# Altium PCB PCB1.PcbDoc
Units mm, origin at the board's own origin, x right, y up, seen from the top; angles counter-clockwise.
Board outline 122 x 121 mm, 2 copper layers (Top Layer, Bottom Layer); 36 components, 35 nets, 128 pads, 0 vias.
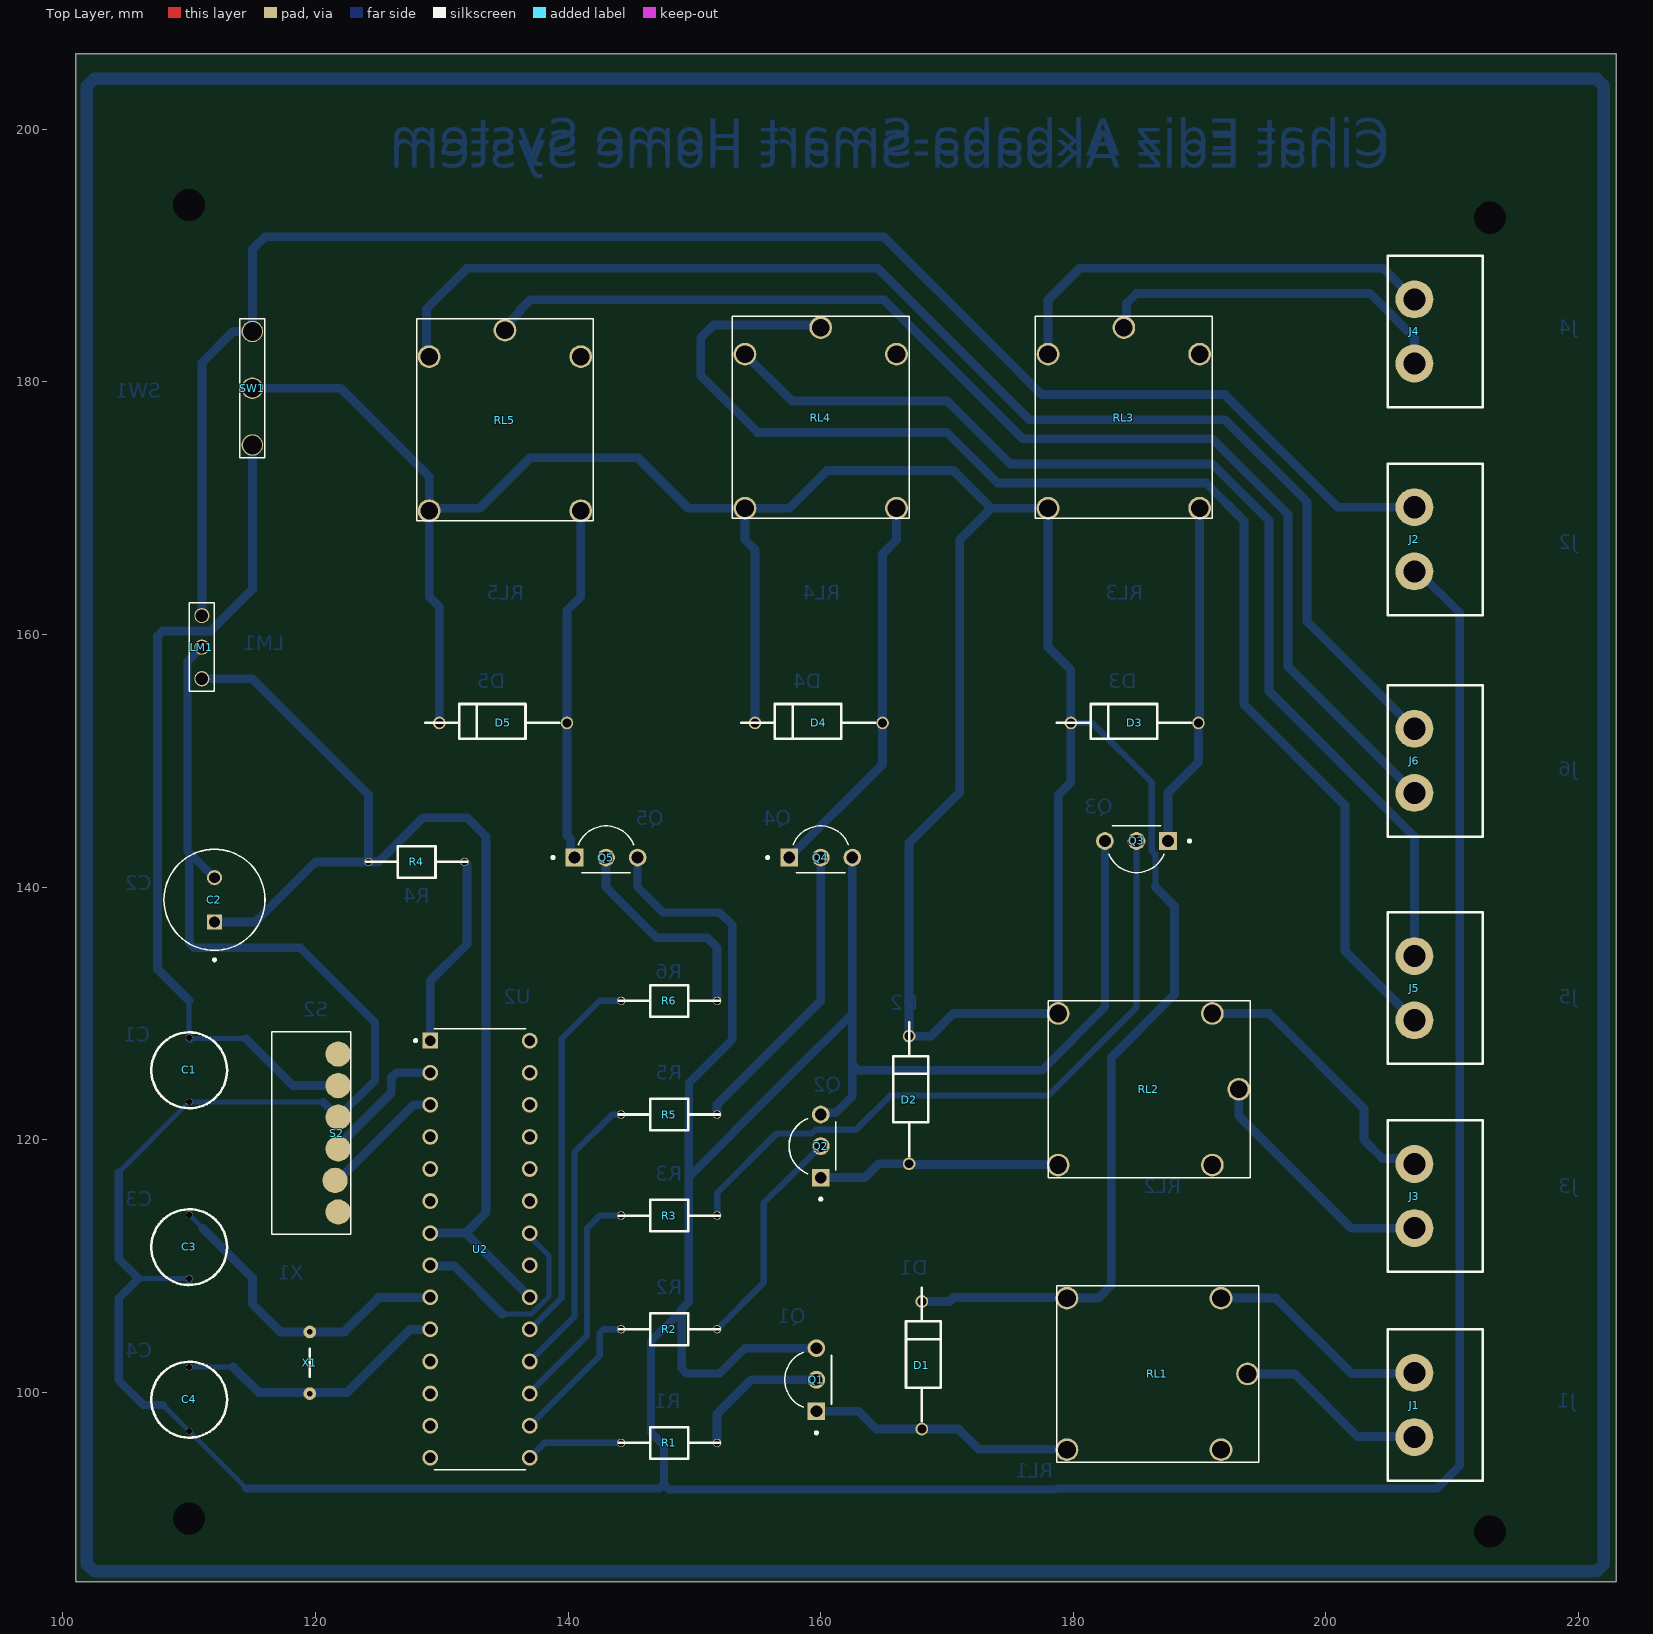
[diagram p0: Top Layer view]
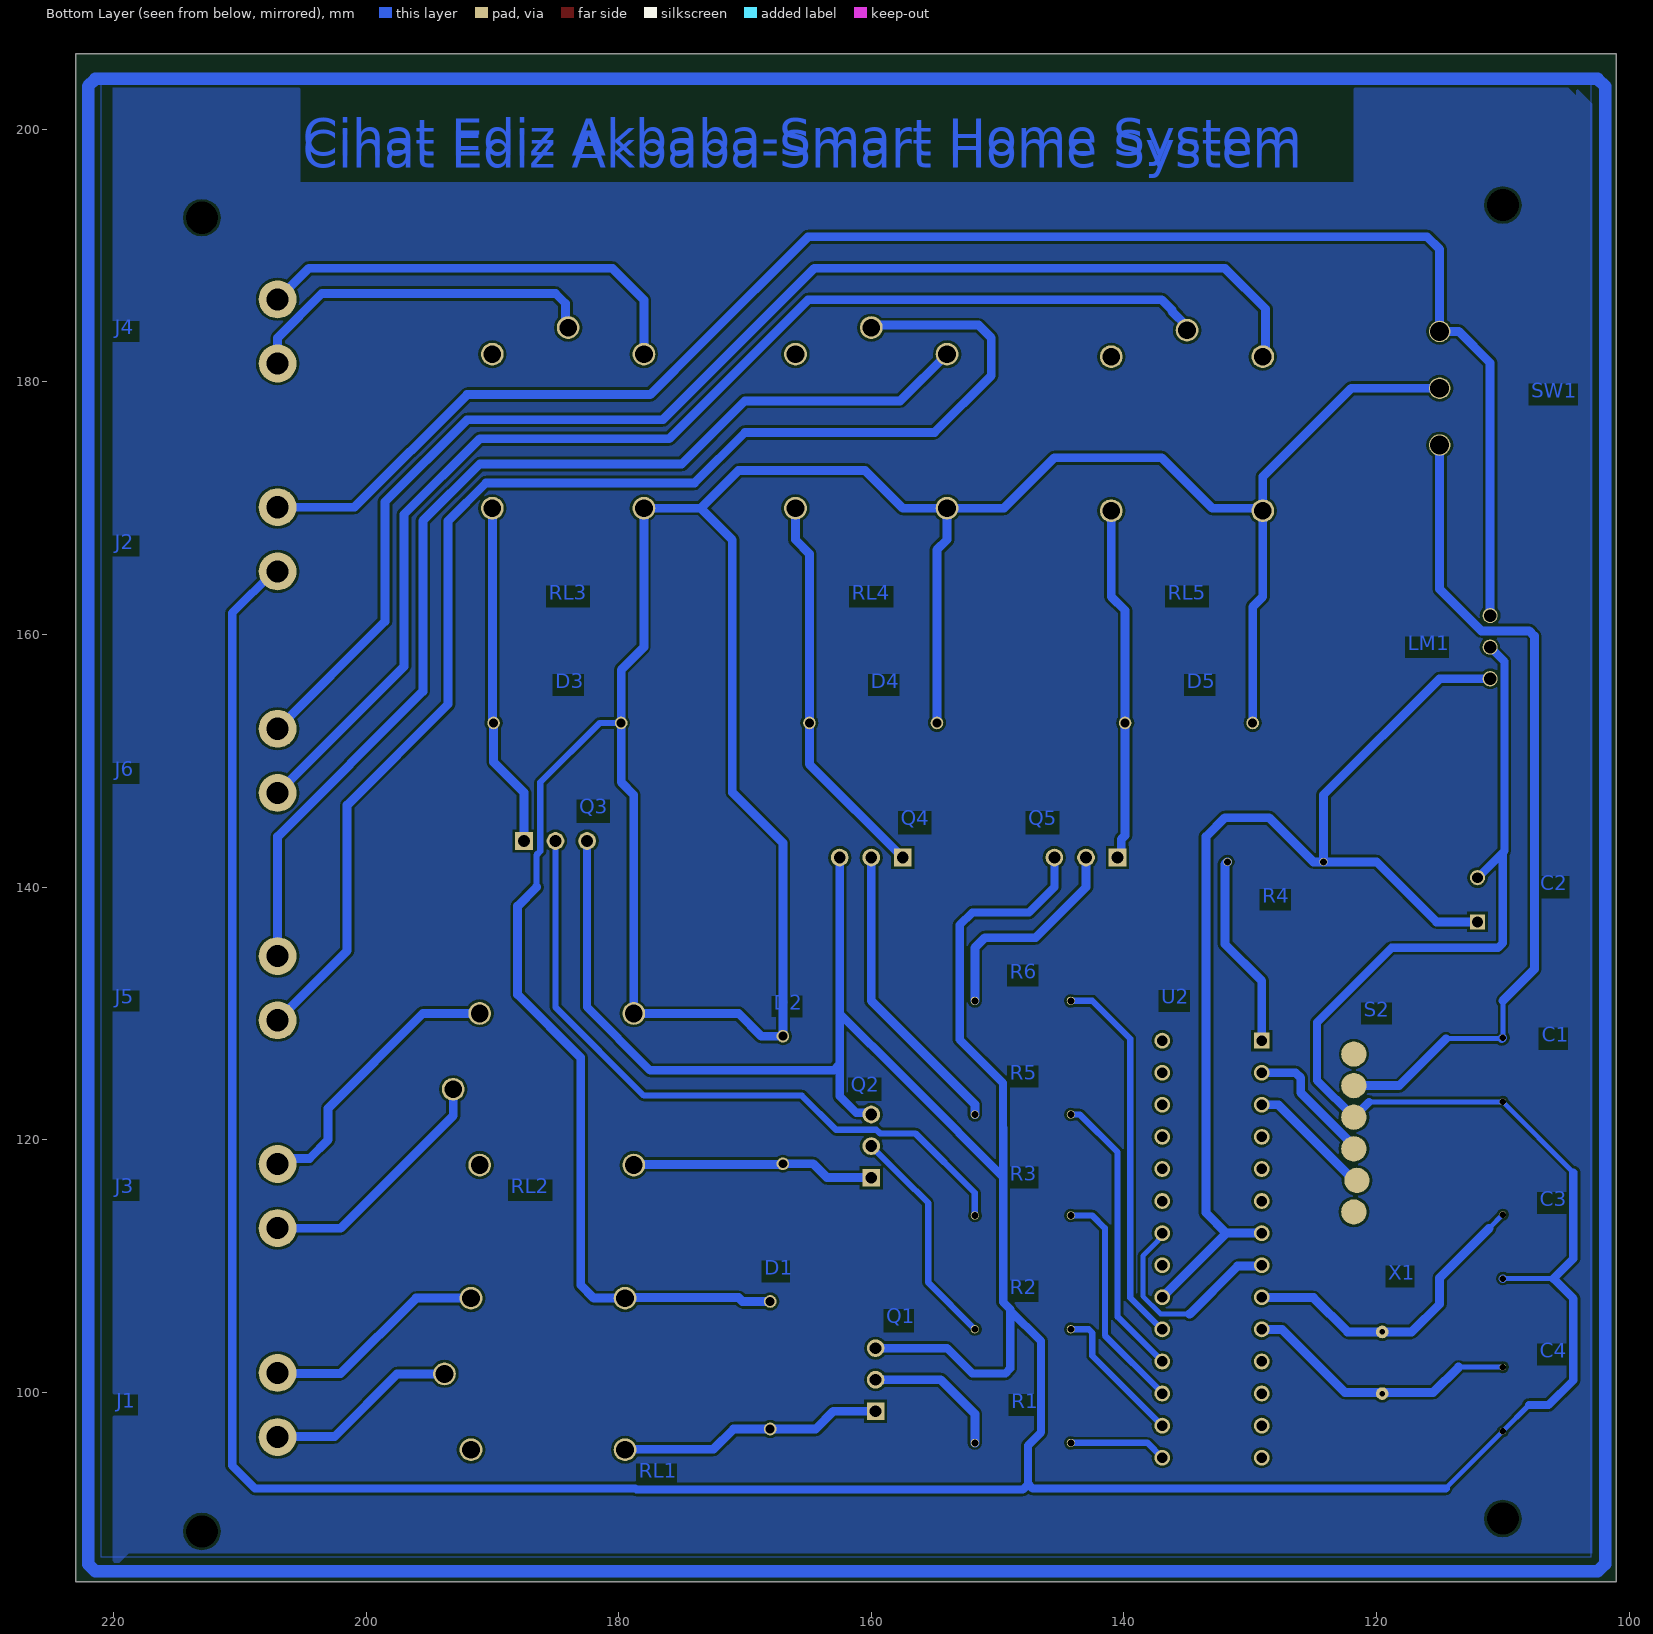
[diagram p1: Bottom Layer view, seen from below]
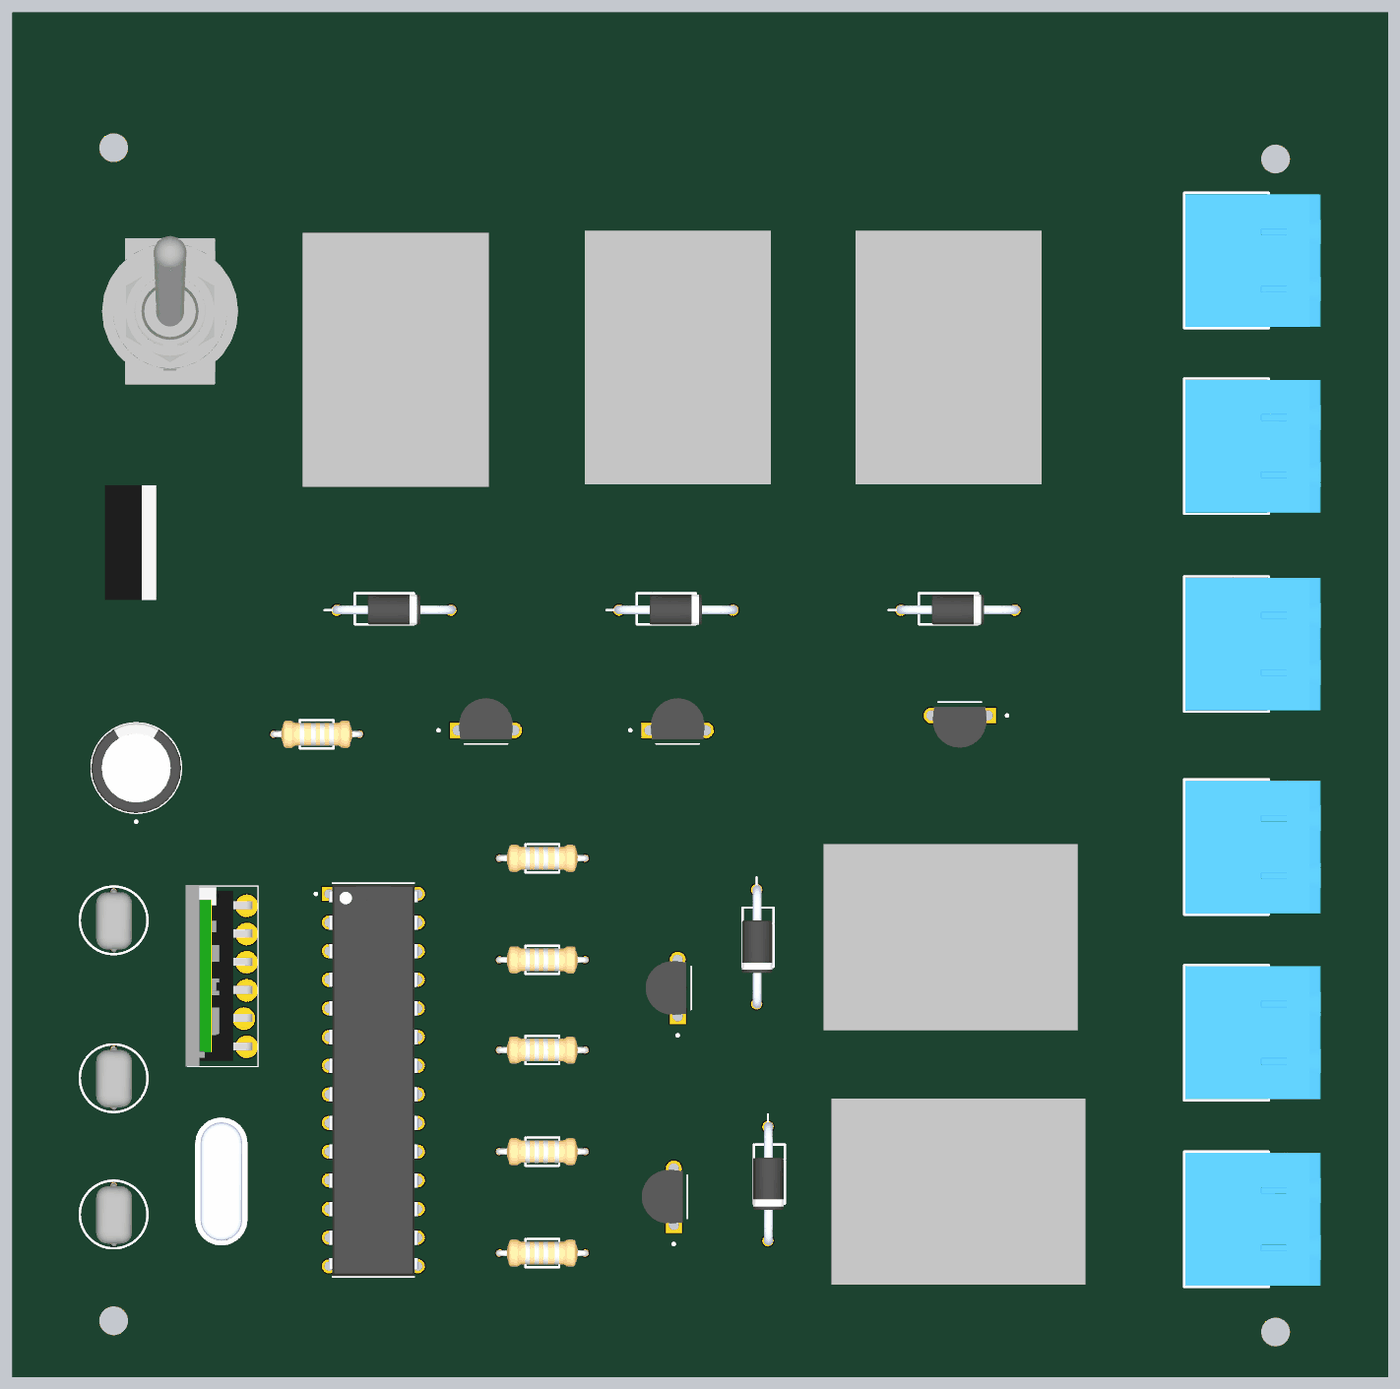
[diagram p2: 3D render of the assembled board from above, using the file's embedded part models]

## Layer stack, top to bottom
Top Solder: solder mask 0.0102, Solder Resist, Dk 3.5
Top Layer: signal copper 0.0356
Dielectric 1: dielectric 0.32, FR-4, Dk 4.8
Bottom Layer: signal copper 0.0356
Bottom Solder: solder mask 0.0102, Solder Resist, Dk 3.5

## Board outline
101,85 223,85 223,206 101,206

## Design rules (kind name [scope] priority, off if disabled: settings)
Clearance [All] p1: gap=0.2 ignorepadtopadclearanceinfootprint=FALSE except(0: Text-Hole; 0.255: Arc-Via Track-Via SMDPad-Via THPad-Via Via-Via)
PolygonConnect [All] p1: connectstyle=Relief reliefconductorwidth=0.254 reliefentries=4 polygonreliefangle="90 Angle" airgapwidth=0.254
RoutingVias [All] p1: holewidth=0.711 width=1.27 viastyle="Through Hole" minholewidth=0.711 minwidth=1.27 maxholewidth=0.711 maxwidth=1.27
SilkToSolderMaskClearance [IsPad] p1: minsilkscreentomaskgap=0 clearancetoexposedcopper=TRUE
SolderMaskExpansion [All] p1: expansion=0.102 istentingtop=FALSE
Width [All] p1: maxlimit=1 minlimit=0.254 preferedwidth=0.65 minimp=50.000000 maximp=50.000000 favimp=50.000000
29 further rules are at their usual default settings.

## Classes and differential pairs
component class Sheet1: 32 C1 C2 D1 D2 D3 D4 D5 J1 J3 J4 J5 L LM1 Q1 Q2 Q3 Q4 Q5 R1 R3 R4 R5 RL1 RL2 RL3 RL4 RL5 S2 SW1 U2 X1

## Components (designator, comment, footprint, x,y, rotation, side; value= is the part's Value field where it differs from the comment)
C1 "capacitor" CAPACITOR 110,123 r90 top
C2 "EEUFR1V101B" CAPPRD350W60D800H1150 112,139 r90 top
C3 "capacitor" CAPACITOR 110,109 r90 top
C4 "capacitor" CAPACITOR 110,96.92 r90 top
D1 "1N4007" 1N4007 168,103 r90 top
D2 "1N4007" 1N4007 167,124 r90 top
D3 "1N4007" 1N4007 184,153 r180 top
D4 "1N4007" 1N4007 159,153 r180 top
D5 "1N4007" 1N4007 134,153 r180 top
J1 "TBP01R1-508-02BE" TBP01R1-508 207,99 r90 top
J2 "TBP01R1-508-02BE" TBP01R1-508 207,167.54 r90 top
J3 "TBP01R1-508-02BE" TBP01R1-508 207,115.54 r90 top
J4 "TBP01R1-508-02BE" TBP01R1-508 207,184 r90 top
J5 "TBP01R1-508-02BE" TBP01R1-508 207,132 r90 top
J6 "TBP01R1-508-02BE" TBP01R1-508 207,150 r90 top
LM1 "LM7805" LM7805 111,161.5 r270 top
Q1 "BC547B" TO92250P510H770-3 159,101 r90 top
Q2 "BC547B" TO92250P510H770-3 159.345,119.5 r90 top
Q3 "BC547B" TO92250P510H770-3 185,143 r180 top
Q4 "BC547B" TO92250P510H770-3 160,143 r0 top
Q5 "BC547B" TO92250P510H770-3 143,143 r0 top
R1 "resistor" RES 148,96 r0 top
R2 "resistor" RES 148,105 r0 top
R3 "resistor" RES 148,114 r0 top
R4 "resistor" RES 128,142 r180 top
R5 "resistor" RES 148,122 r0 top
R6 "resistor" RES 148,131 r0 top
RL1 "relay" relay 191.69,95.461 r180 top
RL2 "relay" relay 191,118 r180 top
RL3 "relay" relay 190,182.2 r270 top
RL4 "relay" relay 166,182.2 r270 top
RL5 "relay" relay 141,182 r270 top
S2 "HC-06" HC-06 118.797,120.285 r90 top
SW1 "Switch" "toggle switch" 115,175 r90 top
U2 "ATMEGA328-PU" DIP787W46P254L3467H508Q28 133.023,111.338 r0 top
X1 "CRYSTAL" CRYSTAL 119.547,102.345 r90 top

## Footprints (in the part's own frame and the unit in brackets; to place one, negate y for a bottom-side part, rotate by r counter-clockwise, add the part's x,y. Pads: shape width x height; smd on the part's side, far side on the other; paste and mask are expansions set on the pad)
1N4007 [mm]
  round 1 hole 0.71: 1(-5.9,0) 2(4.2,0)
  silkscreen extent -5.3,-1.5 5.3,1.25, body extent -6.32,-1.39 4.62,1.3, height 12.69
CAPACITOR [mm]
  round 0.53 hole 0.51: 1(0,0) 2(5.08,0)
  silkscreen extent -0.5,-3 5.5,3, body extent -24.4,-1.63 5.26,5.5, height 6.81
CAPPRD350W60D800H1150 [mm]
  round 1.2 hole 0.85: N(1.75,0)
  rect 1.2x1.2 hole 0.85: P(-1.75,0)
  silkscreen extent -4.85,-4 4,4, body extent -4,-4 4,4, height 11.5
CRYSTAL [mm]
  round 1 hole 0.43: 1(-2.44,0) 2(2.44,0)
  silkscreen extent -1.11,0 1.11,0, body extent -5.67,-2.33 5.67,2.32, height 11.5
DIP787W46P254L3467H508Q28 [mm]
  rect 1.25x1.25 hole 0.83: 1(-3.937,16.51)
  round 1.25 hole 0.83: 2(-3.937,13.97) 3(-3.937,11.43) 4(-3.937,8.89) 5(-3.937,6.35) 6(-3.937,3.81) 7(-3.937,1.27) 8(-3.937,-1.27) 9(-3.937,-3.81) 10(-3.937,-6.35) 11(-3.937,-8.89) 12(-3.937,-11.43) 13(-3.937,-13.97) 14(-3.937,-16.51) 15(3.937,-16.51) 16(3.937,-13.97) 17(3.937,-11.43) 18(3.937,-8.89) 19(3.937,-6.35) 20(3.937,-3.81) 21(3.937,-1.27) 22(3.937,1.27) 23(3.937,3.81) 24(3.937,6.35) 25(3.937,8.89) 26(3.937,11.43) 27(3.937,13.97) 28(3.937,16.51)
  silkscreen extent -5.2,-17.45 3.62,17.45, body extent -3.95,-17.34 3.95,17.34, height 4.57
HC-06 [mm]
  round 2 all layers, no hole: 1(-6,-3) 2(-3.5,-2.75) 3(-1,-3) 4(1.5,-3) 5(4,-3) 6(6.5,-3)
  silkscreen extent -7.75,-4 8.25,2.25, body extent -7.75,-3.5 8.35,2.4, height 39
LM7805 [mm]
  round 1.2 hole 1: 1(0,0) 2(2.5,0) 3(5,0)
  silkscreen extent -1,-1 6,1, body extent -2.58,-1.8 7.58,2.77, height 21.74
relay [mm]
  round 1.8 hole 1.4: 1(12.2,0) 2(12.2,-12) C(-2.1,-6) NC(0,0) NO(0,-12)
  silkscreen extent -3,-13 13,1, body extent -4.45,-14.25 18.05,2.25, height 21
RES [mm]
  round 0.65 hole 0.55: 1(-3.8,0) 2(3.8,0)
  silkscreen extent -4,-1.25 4,1.25, body extent -4.09,-1.2 4.08,1.2, height 4.2
TBP01R1-508 [mm]
  round 3 hole 1.75 mask+0.05: 1(-2.54,0) 2(2.54,0)
  silkscreen extent -6,-5.4 6,2.1, body extent -5.88,-10 5.88,2, height 8.55
TO92250P510H770-3 [mm]
  rect 1.4x1.4 hole 0.93: 1(-2.5,-0.655)
  round 1.4 hole 0.93: 2(0,-0.655) 3(2.5,-0.655)
  silkscreen extent -4.3,-1.85 2.18,1.85, body extent -2.38,-1.43 2.38,2.19, height 5.33
"toggle switch" [mm]
  round 1.7 hole 1.5: 1(0,0) 2(4.5,0) 3(9,0)
  silkscreen extent -1,-1 10,1, body extent -1.99,-6.03 11.17,6.03, height 31.6

## Part data
C2: "AL LYTIC, RADIAL, 35VDC, 100UF", Package="RADIAL-2 Panasonic", Availability="In Stock", Check_prices=https://www.snapeda.com/parts/EEUFR1V101B/Panasonic/view-part/5790218/?ref=eda, MF=Panasonic, MP=EEUFR1V101B, Price=None, SnapEDA_Link=https://www.snapeda.com/parts/EEUFR1V101B/Panasonic/view-part/5790218/?ref=snap
J1 J2 J3 J4 J5 J6: "Conn Shrouded Header HDR 2 POS 5.08mm Solder RA Side Entry Thru-Hole Bag", Manufacturer=CUI, Supplier Part Number 1=102-6406-ND, Designed by=BERK, Manufacturer Part Number=TBP01R1-508-02BE, Pricing 1="1=0,50000, 10=0,26500, 25=0,18760, 50=0,15960, 100=0,15400, 250=0,13020, 500=0,12040, 1000=0,10640, 5000=0,08120 (USD)", RoHS=No, Stock 1=3398, Supplier 1=Digi-Key
Q1 Q2 Q3 Q4 Q5: "Bipolar (BJT) Transistor NPN 45 V 100 mA 300MHz 625 mW Through Hole TO-92 (TO-226)", Package="TO-92-3 ON Semiconductor", Availability="In Stock", Check_prices=https://www.snapeda.com/parts/BC547B/Onsemi/view-part/?ref=eda, MF="ON Semiconductor", MP=BC547B, Price=None, Purchase-URL=https://pricing.snapeda.com/search/part/BC547B/?ref=eda, SnapEDA_Link=https://www.snapeda.com/parts/BC547B/Onsemi/view-part/?ref=snap
U2: "AVR AVRÂ® ATmega Microcontroller IC 8-Bit 20MHz 32KB (16K x 16) FLASH 28-PDIP", Package="DIP-28 Microchip Technology", Availability="In Stock", Check_prices=https://www.snapeda.com/parts/ATMEGA328-PU/Microchip/view-part/?ref=eda, MF="Microchip Technology", MP=ATMEGA328-PU, Price=None, Purchase-URL=https://pricing.snapeda.com/search/part/ATMEGA328-PU/?ref=eda, SnapEDA_Link=https://www.snapeda.com/parts/ATMEGA328-PU/Microchip/view-part/?ref=snap

## Free pads (board coordinates)
  round 1.2 hole 2.54: 29(110,90) 29(110,194) 29(213,89) 29(213,193)

## Nets (pads, with @x,y where several pads share a name; then routed paths per layer and width w, separated by ;. In a path a pad name is that pad's centre, name@x,y a point inside that pad or via, vN(x,y) a via of type N, cw(c..) or ccw(c..) an arc to the next point about the centre after c; other vN are vias at no path point)
+5: C1.2 S2.5 SW1.1 | length 66.7
  Bottom Layer w0.4: C1.2 110,131 ; C1.2@110.08,128 114.5,128
  Bottom Layer w0.7: C1.2 C1.2@110.08,128 ; 110,131 107.5,133.5 107.5,159.88 107.91,160.29 111.71,160.29 115,163.58 SW1.1 ; 114.5,128 118.215,124.285 S2.5
+12: J2.2 LM1.1 SW1.3 | length 132.8
  Bottom Layer w0.7: LM1.1 111,181.5 113.5,184 SW1.3 115,190.5 116,191.5 165,191.5 173.5,183 177.5,179 192,179 200.92,170.08 J2.2
CommonRelay: D1.2 D2.2 D3.2 D4.2 D5.2 RL1.2 RL2.2 RL3.2 RL4.2 RL5.2 SW1.2 | length 273.7
  Bottom Layer w0.5: D3.2 181.5,153 186.204,148.296 186.204,142.838 186.5,142.542 186.5,140
  Bottom Layer w0.7: SW1.2 122,179.5 129,172.5 RL5.2 ; D5.2 129.8,162.2 129,163 RL5.2 ; D4.2 154.8,166.7 154,167.5 RL4.2 ; D1.2 170.2,107.2 170.5,107.5 179.451,107.5 RL1.2 181.961,107.461 183,108.5 183,126.5 188,131.5 188,138.5 186.5,140 ; RL5.2 129.2,170 133,170 137,174 145.5,174 149.5,170 RL4.2 ; RL4.2 157.5,170 160.5,173 170.5,173 173.5,170 ; 173.5,170 171,167.5 171,147.5 167,143.5 D2.2 168.7,128.2 170.5,130 RL2.2 178.8,147.3 179.8,148.3 D3.2 179.8,157.2 178,159 RL3.2 173.5,170
GND: C1.1 C2.N C3.1 C4.1 J2.1 LM1.2 Q1.3 Q2.3 Q3.3 Q4.3 Q5.3 S2.4 U2.8 U2.22 | length 445.5
  Bottom Layer w0.4: 104.416,117.416 C1.1 120.582,123 ; 105.979,109.021 C3.1@109.979,109.021 ; 107.92,99 C4.1 114.52,92.4 ; 134.8,106.2 137.082,106.2 138.5,107.618 138.5,110.8 137.292,112.008 137.292,112.046 136.96,112.378 U2.22
  Bottom Layer w0.65: 104.416,117.416 104.416,110.584 106,109 104.419,107.419 104.419,100.962 106.381,99 107.92,99 ; C3.1@109.979,109.021 C3.1 ; LM1.2 109.875,157.875 109.875,142.875 110,142.75 ; C2.N@111.93,140.93 111.82,140.93 110,142.75 ; 114.52,92.4 147.219,92.4 147.6,92.781 147.6,95.804 146.566,96.838 146.566,104.066 149,106.5 ; 120.582,123 S2.4 124.7,124.688 124.7,129.3 118.8,135.2 110.381,135.2 110,135.581 110,142.75 ; Q5.3 145.5,140 147.5,138 152,138 153,137 153,127.937 149.563,124.5 149.563,120.942 ; 147.6,92.7 148,92.3 178.593,92.3 178.693,92.4 208.8,92.4 210.6,94.2 210.6,161.7 207.3,165 J2.1 ; 149.558,120.942 149.558,117.058 ; Q1.3 154,103.5 152,101.5 149.381,101.5 149,101.881 149,106.5 ; Q2.3 160.144,122.144 161.196,122.144 162.5,123.448 162.5,126 ; Q4.3 162.5,130 ; Q3.3@182.5,143.5 182.5,130.5 177.5,125.5 163,125.5 162.5,126 ; 149,106.5 149,106.587 149.558,107.146 149.558,117.058 ; 149.558,117.058 156.625,124.125 157.5,125 162.5,130 ; 162.5,126 162.5,130
  Bottom Layer w0.7: U2.8@129,110 131,110 134.8,106.2
NetC2_P: C2.P LM1.3 R4.2 U2.7 U2.20 | length 89.9
  Bottom Layer w0.7: LM1.3 115,156.5 124.2,147.3 R4.2 ; C2.P 115.25,137.25 120,142 R4.2 ; U2.7 131.88,112.608 ; U2.20 131.88,112.608 ; R4.2 125,142 128.5,145.5 132,145.5 133.5,144 133.5,114.228 131.88,112.608
NetD1_1: D1.1 Q1.1 RL1.1 | length 21.1
  Bottom Layer w0.7: Q1.1 163,98.5 164.4,97.1 D1.1 170.9,97.1 172.5,95.5 179.451,95.5 RL1.1
NetD2_1: D2.1 Q2.1 RL2.1 | length 19.3
  Bottom Layer w0.7: Q2.1 163.5,117 164.6,118.1 D2.1 167.05,118.05 178.75,118.05 RL2.1
NetD3_1: D3.1 Q3.1 RL3.1 | length 27.4
  Bottom Layer w0.7: Q3.1 187.5,147.5 189.9,149.9 D3.1 189.957,153.057 189.957,153.27 190,153.312 RL3.1
NetD4_1: D4.1 Q4.1 RL4.1 | length 31.2
  Bottom Layer w0.7: Q4.1 164.9,149.745 D4.1 164.9,166.4 166,167.5 RL4.1
NetD5_1: D5.1 Q5.1 RL5.1 | length 28.2
  Bottom Layer w0.7: Q5.1 140.205,142.64 140.205,143.795 139.9,144.1 D5.1 139.9,161.9 141,163 RL5.1
NetJ1_1: J1.1 RL1.C | length 15.3
  Bottom Layer w0.7: RL1.C 197.539,101.461 202.5,96.5 206.96,96.5 J1.1
NetJ1_2: J1.2 RL1.NO | length 17.8
  Bottom Layer w0.7: RL1.NO 196.039,107.461 202,101.5 206.96,101.5 J1.2
NetJ3_1: J3.1 RL2.C | length 19.7
  Bottom Layer w0.7: RL2.C 193.1,121.9 202,113 J3.1
NetJ3_2: J3.2 RL2.NO | length 22.4
  Bottom Layer w0.7: RL2.NO 195.5,130 203,122.5 203,120 204.48,118.52 206.56,118.52 J3.2
NetJ4_1: J4.1 RL3.C | length 28.6
  Bottom Layer w0.7: RL3.C 184.21,184.51 184.21,186.21 185,187 203.5,187 207,183.5 J4.1
NetJ4_2: J4.2 RL3.NO | length 35.4
  Bottom Layer w0.7: RL3.NO 178,186.5 180.5,189 204.54,189 J4.2
NetJ5_1: J5.1 RL4.C | length 105.9
  Bottom Layer w0.7: RL4.C 159.8,184.5 151.5,184.5 150.5,183.5 150.5,180.5 155,176 170,176 174,172 190.5,172 193.5,169 193.5,154.5 201.5,146.5 201.5,134.96 J5.1
NetJ5_2: J5.2 RL4.NO | length 86.2
  Bottom Layer w0.7: RL4.NO 157.7,178.5 170,178.5 175,173.5 191,173.5 195.5,169 195.5,155.5 207,144 J5.2
NetJ6_1: J6.1 RL5.C | length 96.5
  Bottom Layer w0.7: RL5.C 135,184.398 136.2,185.598 136.2,185.7 137,186.5 165,186.5 176,175.5 191,175.5 197,169.5 197,157.46 J6.1
NetJ6_2: J6.2 RL5.NO | length 104.1
  Bottom Layer w0.7: RL5.NO 128.79,182.21 128.79,185.79 132,189 164.5,189 176.5,177 192,177 198.5,170.5 198.5,161.04 J6.2
NetQ1_2: Q1.2 R1.2 | length 11.3
  Bottom Layer w0.7: R1.2 151.8,98.3 154.5,101 Q1.2
NetQ2_2: Q2.2 R2.2 | length 17.9
  Bottom Layer w0.5: R2.2 155.5,108.7 155.5,115 157.5,117 Q2.2
NetQ3_2: Q3.2 R3.2 | length 54.2
  Bottom Layer w0.5: R3.2 151.8,115.8 156.5,120.5 159.297,120.5 159.593,120.796 162.796,120.796 165.5,123.5 178,123.5 185,130.5 Q3.2
NetQ4_2: Q4.2 R5.2 | length 23.7
  Bottom Layer w0.7: R5.2 151.8,122.8 160,131 Q4.2
NetQ5_2: Q5.2 R6.2 | length 17.3
  Bottom Layer w0.7: Q5.2 143,140 147,136 151,136 151.8,135.2 R6.2
NetR4_1: R4.1 U2.1 | length 15.4
  Bottom Layer w0.7: U2.1 129.086,132.586 132,135.5 132,141.8 R4.1
PB1: R1.1 U2.15 | length 7.7
  Bottom Layer w0.5: U2.15 138.132,96 R1.1
PB2: R2.1 U2.16 | length 11.5
  Bottom Layer w0.5: U2.16 142.5,102.908 142.5,104.707 142.793,105 R2.1
PB3: R3.1 U2.17 | length 18.1
  Bottom Layer w0.5: U2.17 136.96,99.96 141.5,104.5 141.5,113 142.5,114 R3.1
PB4: R5.1 U2.18 | length 23
  Bottom Layer w0.5: U2.18 136.96,102.46 140.5,106 140.5,119 143.5,122 R5.1
PB5: R6.1 U2.19 | length 30
  Bottom Layer w0.5: U2.19 136.988,104.988 139.5,107.5 139.5,128 142.5,131 R6.1
RXD1: S2.2 U2.3 | length 10
  Bottom Layer w0.7: S2.2 121.785,116.785 127.768,122.768 U2.3
TXD1: S2.3 U2.2 | length 10.6
  Bottom Layer w0.7: S2.3 121.797,119.517 126,123.72 126,124.898 126.41,125.308 U2.2
XTAL1: C3.2 U2.9 X1.2 | length 25.3
  Bottom Layer w0.4: C3.2 111.08,113
  Bottom Layer w0.7: 111.08,113 115,109.08 115,107 117.215,104.785 X1.2 122.285,104.785 125,107.5 129.058,107.5 U2.9
XTAL2: C4.2 U2.10 X1.1 | length 22.1
  Bottom Layer w0.4: C4.2 113.5,102
  Bottom Layer w0.7: 113.5,102 115.5,100 119.452,100 X1.1 119.642,100 122.5,100 127.488,104.988 U2.10
pads on no net: RL1.NC RL2.NC RL3.NC RL4.NC RL5.NC S2.1 S2.6 U2.4 U2.5 U2.6 U2.11 U2.12 U2.13 U2.14 U2.21 U2.23 U2.24 U2.25 U2.26 U2.27 U2.28
copper on no net: | length 475.2
  Bottom Layer w1: 101.9,86.411 102.486,85.825 221.414,85.825 222,86.411 222,95.214 222,203.414 221.414,204 102.486,204 101.9,203.414 101.9,86.411

## Polygon pours and split planes (outlines as drawn)
no net on Bottom Layer "AC_LINE_2" (solid, pour order 4): 104.175,202.65 104.8,203.275 220.05,203.275 220.05,86.65 219.725,86.325 218.775,87.275 102.925,87.275 102.925,202.025 104.175,203.275
no net on Bottom Layer "AC_LINE_2" (none, pour order 3): 109,184
GND on Bottom Layer "AC_LINE_2" (solid, shelved, pour order 1): 103,204 221,204 221,87 103,87 103,204
GND on Bottom Layer "GND" (solid, shelved, pour order 0): 103,204 221,204 221,87 103,87
no net on Top Component Center "AC_LINE_2" (solid, shelved): 103,204

## Other copper
Bottom Layer:
  text "Cihat Ediz Akbaba-Smart Home System" at 205,196.939 h5
  text "Cihat Ediz Akbaba-Smart Home System" at 205,196 h5

## Silkscreen, mask and mechanical layers (free items; w line width, h text height)
Mechanical 15:
  pour cut-out: 152,139